# Altium PCB fororder.PcbDoc
Units mil, origin at the board's own origin, x right, y up, seen from the top; angles counter-clockwise.
Board outline 6000 x 4000 mil, 2 copper layers (Top Layer, Bottom Layer), stack 12.8 mil thick; 9 components, 16 nets, 58 pads, 0 vias.
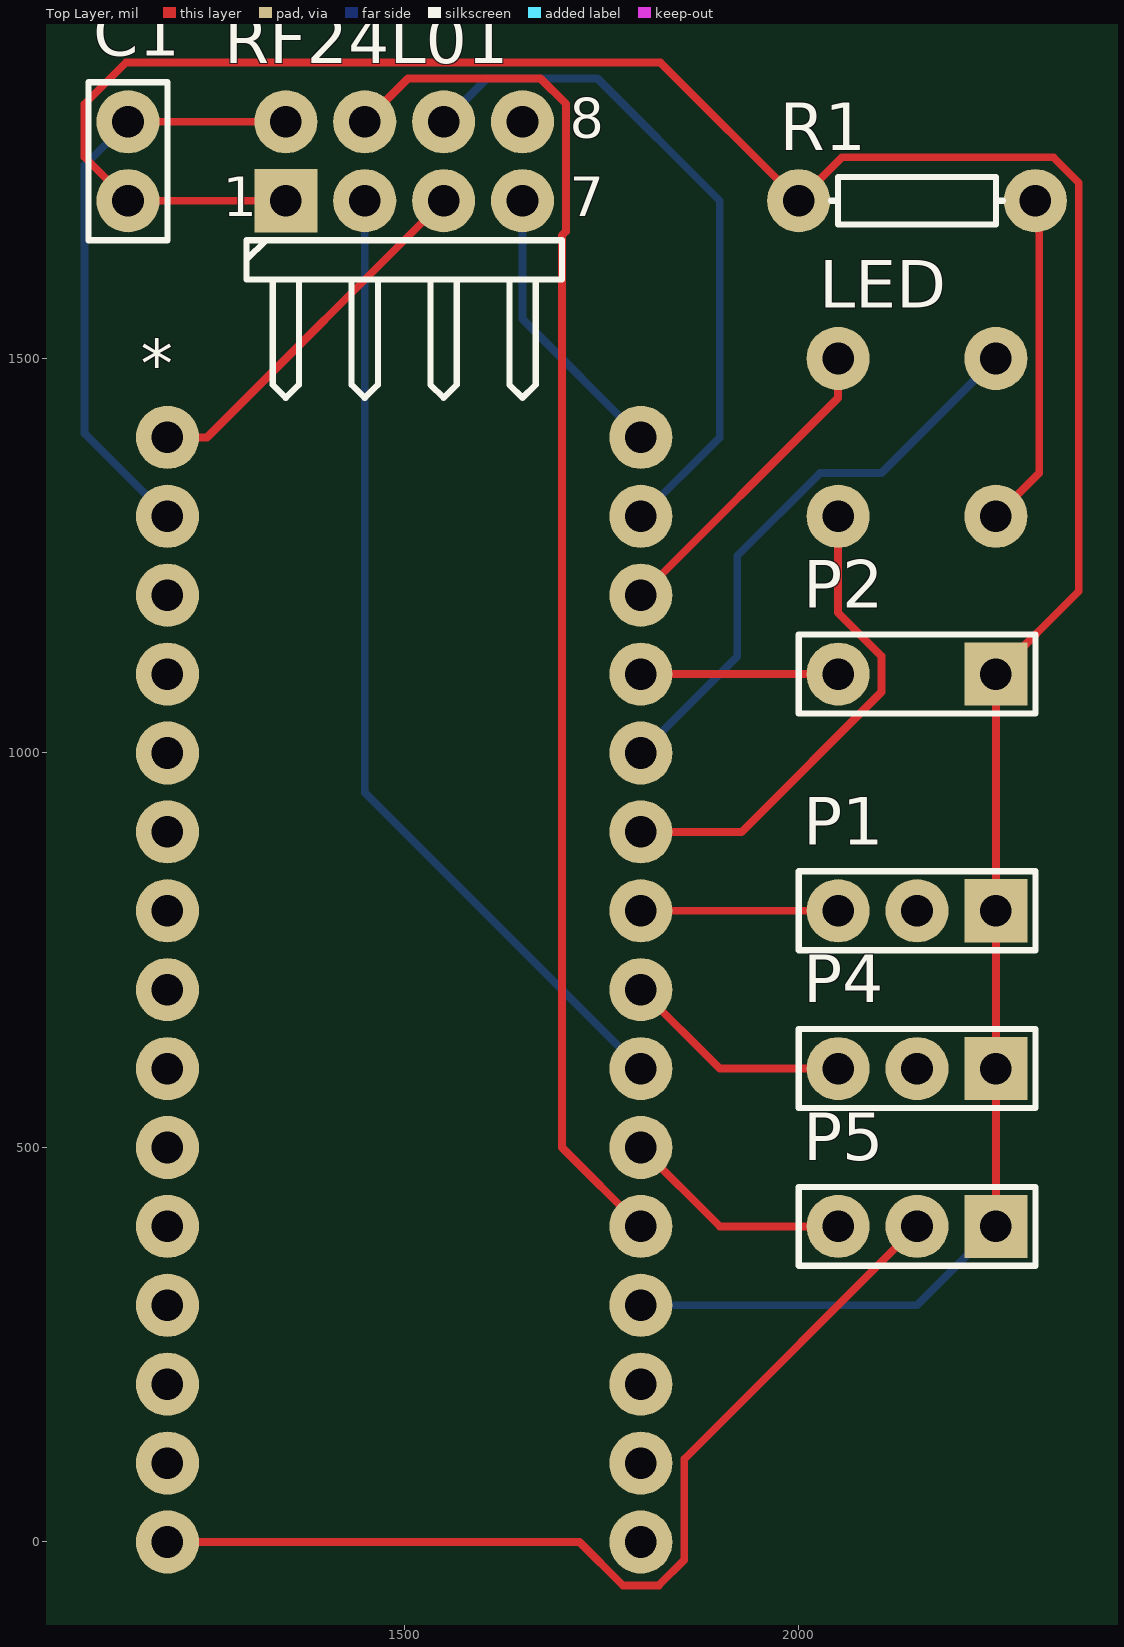
[diagram p0: Top Layer view]
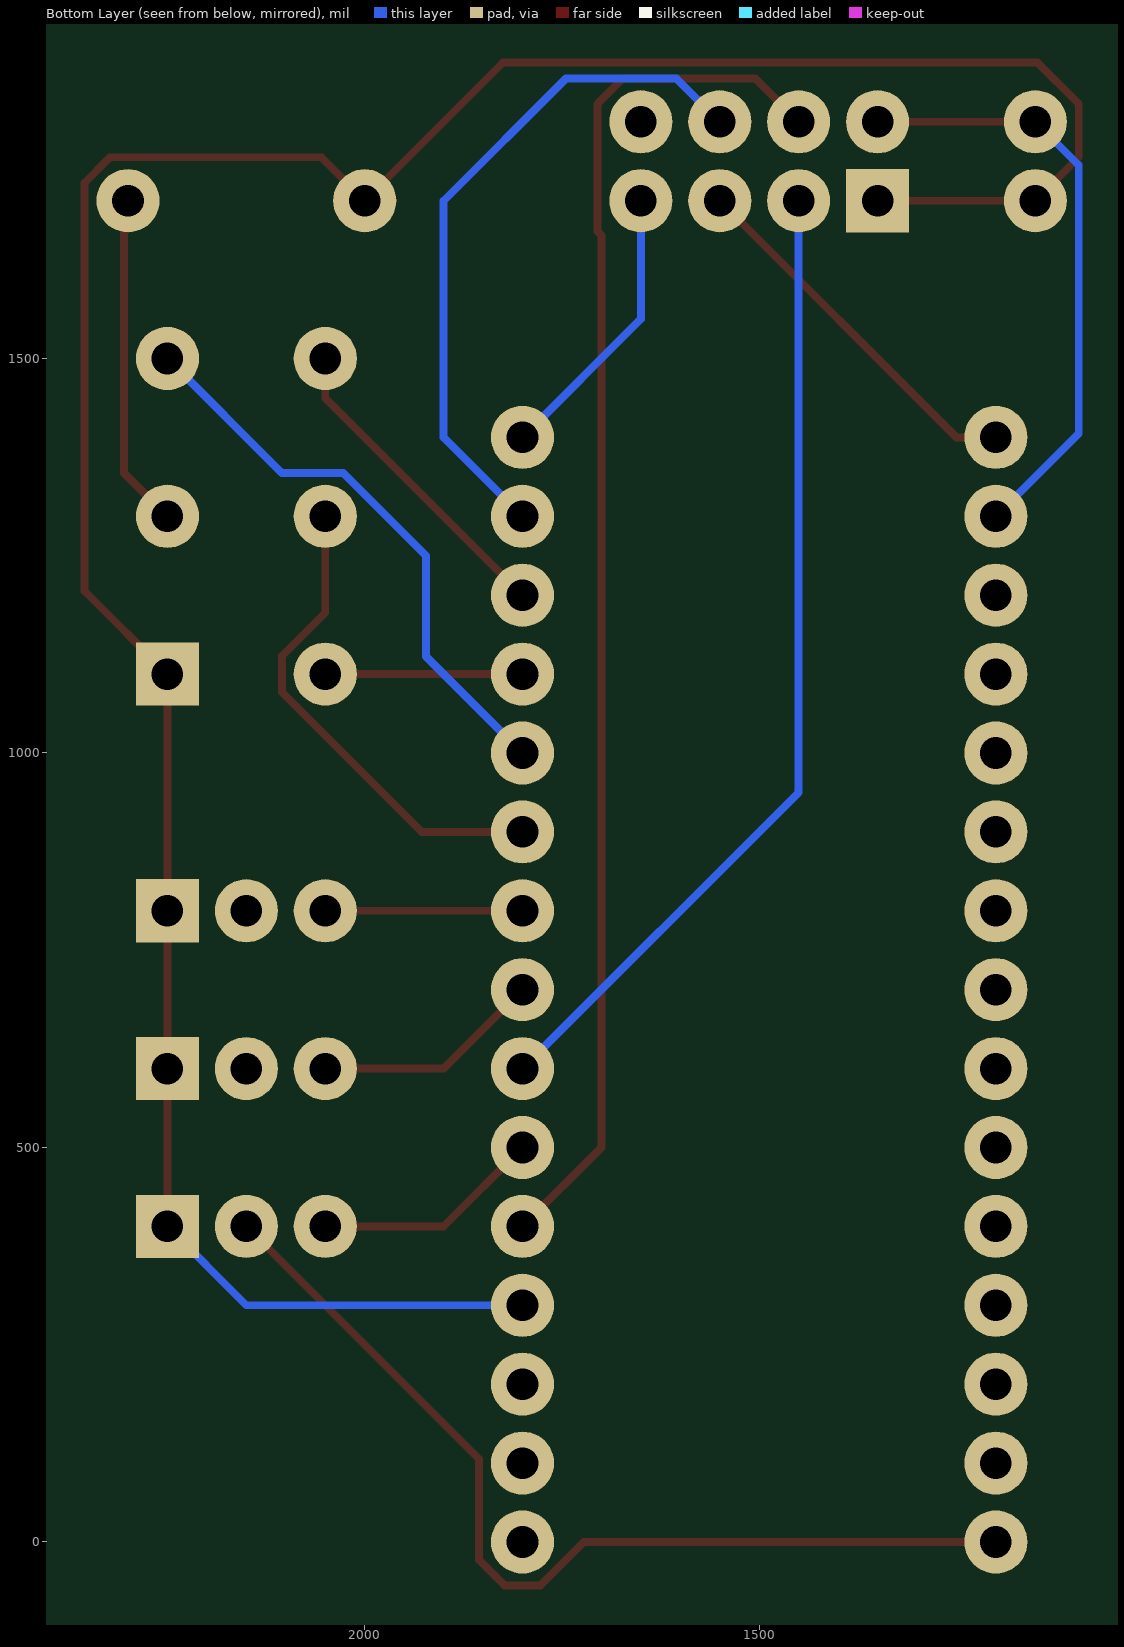
[diagram p1: Bottom Layer view, seen from below]

## Layer stack, top to bottom
Top Layer: signal copper 1.4
Dielectric 1: core 10, FR-1, Dk 4.2
Bottom Layer: signal copper 1.4

## Board outline
-970,-1465 5030,-1465 5030,2535 -970,2535

## Design rules (kind name [scope] priority, off if disabled: settings)
AssemblyTestPointUsage [All] p0: scope1count=1 scope1_0_kind=Board scope1_0_value=Board scope2count=1 scope2_0_kind=Board scope2_0_value=Board commentlength=0
AssemblyTestpoint [All] p0: scope1count=1 scope1_0_kind=Board scope1_0_value=Board scope2count=1 scope2_0_kind=Board scope2_0_value=Board commentlength=0
Clearance [All] p0: scope1count=1 scope1_0_kind=Board scope1_0_value=Board scope2count=1 scope2_0_kind=Board scope2_0_value=Board commentlength=0 gap=10
Clearance [All] p1: gap=10 ignorepadtopadclearanceinfootprint=TRUE
ComponentClearance [All] p0: scope1count=1 scope1_0_kind=Board scope1_0_value=Board scope2count=1 scope2_0_kind=Board scope2_0_value=Board commentlength=0 gap=10 collisioncheckmode=3
DiffPairsRouting [All] p0: scope1count=1 scope1_0_kind=Board scope1_0_value=Board scope2count=1 scope2_0_kind=Board scope2_0_value=Board commentlength=0
FabricationTestPointUsage [All] p0: scope1count=1 scope1_0_kind=Board scope1_0_value=Board scope2count=1 scope2_0_kind=Board scope2_0_value=Board commentlength=0 valid=0 allowmultiple=FALSE
FabricationTestpoint [All] p0: scope1count=1 scope1_0_kind=Board scope1_0_value=Board scope2count=1 scope2_0_kind=Board scope2_0_value=Board commentlength=0 side=3 testpointundercomponent=TRUE minsize=40 maxsize=100 preferedsize=60 minholesize=0 maxholesize=40 preferedholesize=32 testpointgrid=1
FanoutControl Fanout_Default [All] p0: scope1count=1 scope1_0_kind=Board scope1_0_value=Board scope2count=1 scope2_0_kind=Board scope2_0_value=Board commentlength=30 // Fanout_Default (Default Rule)
FanoutControl Fanout_Small [All] p0 off: scope1count=1 scope1_0_kind=Board scope1_0_value=Board scope2count=1 scope2_0_kind=Board scope2_0_value=Board commentlength=84 // Protel DXP Scope 1 Expression Was: (CompPinCount < 5)   Fanout_Small (Default Rule)
FanoutControl Fanout_SOIC [All] p0 off: scope1count=1 scope1_0_kind=Board scope1_0_value=Board scope2count=1 scope2_0_kind=Board scope2_0_value=Board commentlength=71 // Protel DXP Scope 1 Expression Was: IsSOIC   Fanout_SOIC (Default Rule)
FanoutControl Fanout_LCC [All] p0 off: scope1count=1 scope1_0_kind=Board scope1_0_value=Board scope2count=1 scope2_0_kind=Board scope2_0_value=Board commentlength=69 // Protel DXP Scope 1 Expression Was: IsLCC   Fanout_LCC (Default Rule)
FanoutControl Fanout_BGA [All] p0 off: scope1count=1 scope1_0_kind=Board scope1_0_value=Board scope2count=1 scope2_0_kind=Board scope2_0_value=Board commentlength=69 // Protel DXP Scope 1 Expression Was: IsBGA   Fanout_BGA (Default Rule)
Height [All] p0: scope1count=1 scope1_0_kind=Board scope1_0_value=Board scope2count=1 scope2_0_kind=Board scope2_0_value=Board commentlength=0
HoleSize [All] p0: scope1count=1 scope1_0_kind=Board scope1_0_value=Board scope2count=1 scope2_0_kind=Board scope2_0_value=Board commentlength=0 absolutevalues=TRUE maxlimit=100 minlimit=35 maxpercent=80.000 minpercent=20.000
HoleSize [All] p1: absolutevalues=TRUE maxlimit=100 minlimit=35 maxpercent=80.000 minpercent=20.000
HoleToHoleClearance [All] p0: scope1count=1 scope1_0_kind=Board scope1_0_value=Board scope2count=1 scope2_0_kind=Board scope2_0_value=Board commentlength=0
HoleToHoleClearance [All] p1: gap=1 allowstackedmicrovias=TRUE
LayerPairs [All] p0: scope1count=1 scope1_0_kind=Board scope1_0_value=Board scope2count=1 scope2_0_kind=Board scope2_0_value=Board commentlength=0 enforce=TRUE
MinimumAnnularRing [All] p0: scope1count=1 scope1_0_kind=Board scope1_0_value=Board scope2count=1 scope2_0_kind=Board scope2_0_value=Board commentlength=0 minimumring=10
MinimumAnnularRing [All] p1: minimumring=10
MinimumSolderMaskSliver [All] p0: scope1count=1 scope1_0_kind=Board scope1_0_value=Board scope2count=1 scope2_0_kind=Board scope2_0_value=Board commentlength=0
NetAntennae [All] p0: scope1count=1 scope1_0_kind=Board scope1_0_value=Board scope2count=1 scope2_0_kind=Board scope2_0_value=Board commentlength=0
PasteMaskExpansion [All] p0: scope1count=1 scope1_0_kind=Board scope1_0_value=Board scope2count=1 scope2_0_kind=Board scope2_0_value=Board commentlength=0 expansion=0
PlaneClearance [All] p0: scope1count=1 scope1_0_kind=Board scope1_0_value=Board scope2count=1 scope2_0_kind=Board scope2_0_value=Board commentlength=0 clearance=20
PlaneConnect [All] p0: scope1count=1 scope1_0_kind=Board scope1_0_value=Board scope2count=1 scope2_0_kind=Board scope2_0_value=Board commentlength=0 planeconnectstyle=Relief reliefexpansion=20 reliefentries=4 reliefconductorwidth=10 reliefairgap=10
PolygonConnect [All] p0: scope1count=1 scope1_0_kind=Board scope1_0_value=Board scope2count=1 scope2_0_kind=Board scope2_0_value=Board commentlength=0 connectstyle=Relief reliefconductorwidth=10 reliefentries=4 polygonreliefangle="90 Angle"
PolygonConnect [All] p1: connectstyle=Relief reliefconductorwidth=10 reliefentries=4 polygonreliefangle="90 Angle" airgapwidth=10
RoutingCorners [All] p0: scope1count=1 scope1_0_kind=Board scope1_0_value=Board scope2count=1 scope2_0_kind=Board scope2_0_value=Board commentlength=0 cornerstyle=45-Degree minsetback=100 maxsetback=100
RoutingLayers [All] p0: scope1count=1 scope1_0_kind=Board scope1_0_value=Board scope2count=1 scope2_0_kind=Board scope2_0_value=Board commentlength=0 top layer=Automatic bottom layer=Automatic
RoutingPriority [All] p0: scope1count=1 scope1_0_kind=Board scope1_0_value=Board scope2count=1 scope2_0_kind=Board scope2_0_value=Board commentlength=0
RoutingTopology [All] p0: scope1count=1 scope1_0_kind=Board scope1_0_value=Board scope2count=1 scope2_0_kind=Board scope2_0_value=Board commentlength=0 topology=Shortest
RoutingVias [All] p0: scope1count=1 scope1_0_kind=Board scope1_0_value=Board scope2count=1 scope2_0_kind=Board scope2_0_value=Board commentlength=0 holewidth=30 width=50 viastyle="Through Hole" minholewidth=30 minwidth=50 maxholewidth=30 maxwidth=50
RoutingVias [All] p1: holewidth=30 width=50 viastyle="Through Hole" minholewidth=30 minwidth=50 maxholewidth=30 maxwidth=50
ShortCircuit ShortCircuit_1 [All] p0: scope1count=1 scope1_0_kind=Layer scope1_0_value=TOP scope2count=1 scope2_0_kind=Board scope2_0_value=Board commentlength=0 allowed=FALSE
ShortCircuit [All] p0: scope1count=1 scope1_0_kind=Board scope1_0_value=Board scope2count=1 scope2_0_kind=Board scope2_0_value=Board commentlength=0 allowed=FALSE
ShortCircuit ShortCircuit_1 [OnLayer('Top Overlay')] p1: allowed=FALSE
ShortCircuit [All] p2: allowed=FALSE
SilkToBoardRegionClearance [All] p0: scope1count=1 scope1_0_kind=Board scope1_0_value=Board scope2count=1 scope2_0_kind=Board scope2_0_value=Board commentlength=0
SilkToSilkClearance [All] p0: scope1count=1 scope1_0_kind=Board scope1_0_value=Board scope2count=1 scope2_0_kind=Board scope2_0_value=Board commentlength=0
SilkToSolderMaskClearance [All] p0 off: scope1count=1 scope1_0_kind=Board scope1_0_value=Board scope2count=1 scope2_0_kind=Board scope2_0_value=Board commentlength=44 // Protel DXP Scope 1 Expression Was: IsPad
SolderMaskExpansion [All] p0: scope1count=1 scope1_0_kind=Board scope1_0_value=Board scope2count=1 scope2_0_kind=Board scope2_0_value=Board commentlength=0 expansion=4
SolderMaskExpansion [All] p1: expansion=4
UnRoutedNet [All] p0: scope1count=1 scope1_0_kind=Board scope1_0_value=Board scope2count=1 scope2_0_kind=Board scope2_0_value=Board commentlength=0
UnRoutedNet [All] p1: checkbadconnections=TRUE
UnpouredPolygon [All] p0: scope1count=1 scope1_0_kind=Board scope1_0_value=Board scope2count=1 scope2_0_kind=Board scope2_0_value=Board commentlength=0
Width [All] p0: scope1count=1 scope1_0_kind=Board scope1_0_value=Board scope2count=1 scope2_0_kind=Board scope2_0_value=Board commentlength=0 maxlimit=10 minlimit=6 preferedwidth=10
Width [All] p1: maxlimit=10 minlimit=6 preferedwidth=10
26 further rules are at their usual default settings.

## Components (designator, comment, footprint, x,y, rotation, side; value= is the part's Value field where it differs from the comment)
* "Component_1" PCBComponent_1 1200,1400 r0 top
C1 "Cap" RAD-0.1 1150,1750 r90 top
LED "Component_1" LED 2250,1500 r180 top
P1 "M4" HDR1X3#1 2250,800 r180 top
P2 "M1" HDR1X3#2 2250,1100 r180 top
P4 "M3" HDR1X3#1 2250,600 r180 top
P5 "M2" HDR1X3#1 2250,400 r180 top
R1 "Res1" AXIAL-0.3 2150,1700 r180 top
RF24L01 "Header 4X2H" HDR2X4H 1350,1700 r0 top

## Footprints (in the part's own frame and the unit in brackets; to place one, negate y for a bottom-side part, rotate by r counter-clockwise, add the part's x,y. Pads: shape width x height; smd on the part's side, far side on the other; paste and mask are expansions set on the pad)
AXIAL-0.3 [mil] "Axial Device, Thru-Hole; 2 Leads; 0.3 in Pin Spacing"
  round 80 hole 40: 1(-150,0) 2(150,0)
  silkscreen extent -109,-30 109,30
HDR1X3#1 [mil] "Connector; Header; 3 Position"
  rect 80x80 hole 40: 1(0,0)
  round 80 hole 40: 2(100,0) 3(200,0)
  silkscreen extent -50,-50 250,50
HDR1X3#2 [mil] "Connector; Header; 3 Position"
  rect 80x80 hole 40: 1(0,0)
  round 0 all layers, no hole: 2(100,0)
  round 80 hole 40: 3(200,0)
  silkscreen extent -50,-50 250,50
HDR2X4H [mil] "Connector; Header; 4x2 Position; Right Angle"
  rect 80x80 hole 40: 1(0,0)
  round 80 hole 40: 2(0,100) 3(100,0) 4(100,100) 5(200,0) 6(200,100) 7(300,0) 8(300,100)
  silkscreen extent -50,-250 350,-50
LED [mil]
  round 80 hole 40: 1(0,0) 2(200,0) 3(200,200) 4(0,200)
PCBComponent_1 [mil]
  round 80 hole 40: 1(0,0) 2(0,-100) 3(0,-200) 4(0,-300) 5(0,-400) 6(0,-500) 7(0,-600) 8(0,-700) 9(0,-800) 10(0,-900) 11(0,-1000) 12(0,-1100) 13(0,-1200) 14(0,-1300) 15(0,-1400) 16(600,0) 17(600,-100) 18(600,-200) 19(600,-300) 20(600,-400) 21(600,-500) 22(600,-600) 23(600,-700) 24(600,-800) 25(600,-900) 26(600,-1000) 27(600,-1100) 28(600,-1200) 29(600,-1300) 30(600,-1400)
RAD-0.1 [mil] "Radial Cap, Thru-Hole; 2 Leads; 0.1 in Pin Spacing"
  round 80 hole 40: 1(-50,0) 2(50,0)
  silkscreen extent -100,-50 100,50

## Part data
C1: "Capacitor"
P1 P2 P4 P5: library part "Header 3", "Header, 3-Pin"
R1: "Resistor"
RF24L01: "Header, 4-Pin, Dual row, Right Angle"

## Nets (pads, with @x,y where several pads share a name; then routed paths per layer and width w, separated by ;. In a path a pad name is that pad's centre, name@x,y a point inside that pad or via, vN(x,y) a via of type N, cw(c..) or ccw(c..) an arc to the next point about the centre after c; other vN are vias at no path point)
GND: *.27 C1.1 P1.1 P2.1 P4.1 P5.1 R1.2 RF24L01.1 | length 3593.5
  Top Layer w10: RF24L01.1 C1.1 1095,1755 1095,1822.78 1147.22,1875 1825,1875 R1.2 2055,1755 2322.78,1755 2355,1722.78 2355,1205 P2.1 P1.1 P4.1 P5.1
  Bottom Layer w10: *.27 2150,300 P5.1
Net*_1: *.1 RF24L01.5 | length 474.3
  Top Layer w10: *.1 1250,1400 RF24L01.5
Net*_2: *.2 C1.2 RF24L01.2 | length 766.3
  Top Layer w10: C1.2 RF24L01.2
  Bottom Layer w10: C1.2 1095,1745 1095,1405 *.2
Net*_15: *.15 P5.2 | length 1236.1
  Top Layer w10: *.15 1722.22,0 1777.22,-55 1822.78,-55 1855,-22.78 1855,105 P5.2
Net*_16: *.16 RF24L01.7 | length 362.1
  Bottom Layer w10: RF24L01.7 1650,1550 *.16
Net*_17: *.17 RF24L01.6 | length 878.4
  Bottom Layer w10: RF24L01.6 1605,1855 1745,1855 1900,1700 1900,1400 *.17
Net*_18: *.18 LED.2 | length 403.6
  Top Layer w10: *.18 2050,1450 LED.2
Net*_19: *.19 P2.3 | length 250
  Top Layer w10: *.19 P2.3
Net*_20: *.20 LED.1 | length 732
  Bottom Layer w10: *.20 1922.22,1122.22 1922.22,1250 2027.22,1355 2105,1355 LED.1
Net*_21: *.21 LED.3 | length 624
  Top Layer w10: *.21 1927.78,900 2105,1077.22 2105,1122.78 2050,1177.78 LED.3
Net*_22: *.22 P1.3 | length 250
  Top Layer w10: *.22 P1.3
Net*_23: *.23 P4.3 | length 291.4
  Top Layer w10: *.23 1900,600 P4.3
Net*_24: *.24 RF24L01.3 | length 1245
  Bottom Layer w10: RF24L01.3 1450,950 *.24
Net*_25: *.25 P5.3 | length 291.4
  Top Layer w10: *.25 1900,400 P5.3
Net*_26: *.26 RF24L01.4 | length 1757.4
  Top Layer w10: RF24L01.4 1505,1855 1672.78,1855 1705,1822.78 1705,1661.11 1700,1656.11 1700,500 *.26
NetLED_4: LED.4 R1.1 | length 424.9
  Top Layer w10: LED.4 2305,1355 2305,1695 R1.1
pads on no net: *.3 *.4 *.5 *.6 *.7 *.8 *.9 *.10 *.11 *.12 *.13 *.14 *.28 *.29 *.30 P1.2 P2.2 P4.2 RF24L01.8

## Text inside footprints (layer, text, board x,y; h text height)
RF24L01: Top Overlay "8" at 1710,1780 h50; Top Overlay "7" at 1710,1680 h50; Top Overlay "1" at 1270,1680 h50; Keep-Out Layer "2" at 1270,1780 h50